# Altium PCB PCB1.PcbDoc
Units mil, origin at the board's own origin, x right, y up, seen from the top; angles counter-clockwise.
Board outline 2115.03 x 1600.03 mil, 2 copper layers (Top Layer, Bottom Layer); 33 components, 44 nets, 155 pads, 53 vias.
Unrouted connection lines stored in the file: 2.
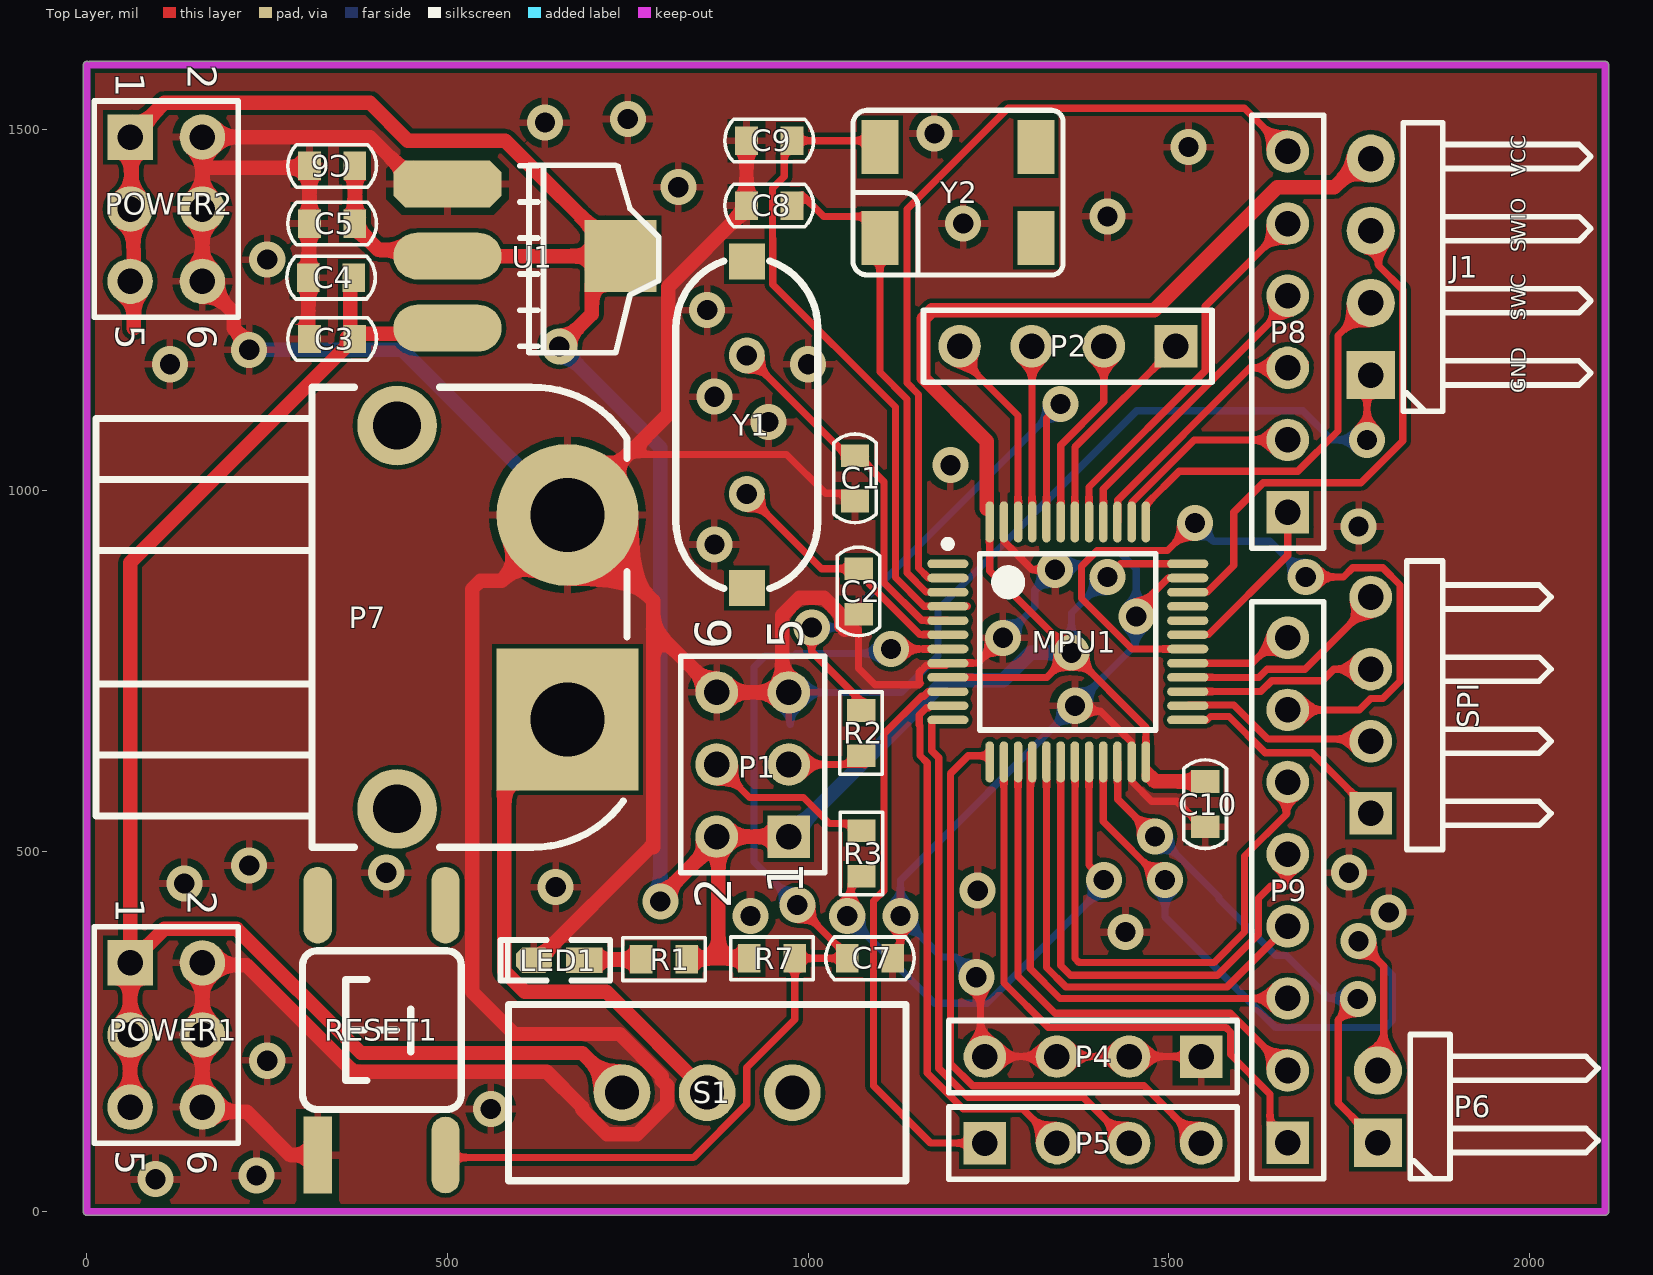
[diagram p0: Top Layer view]
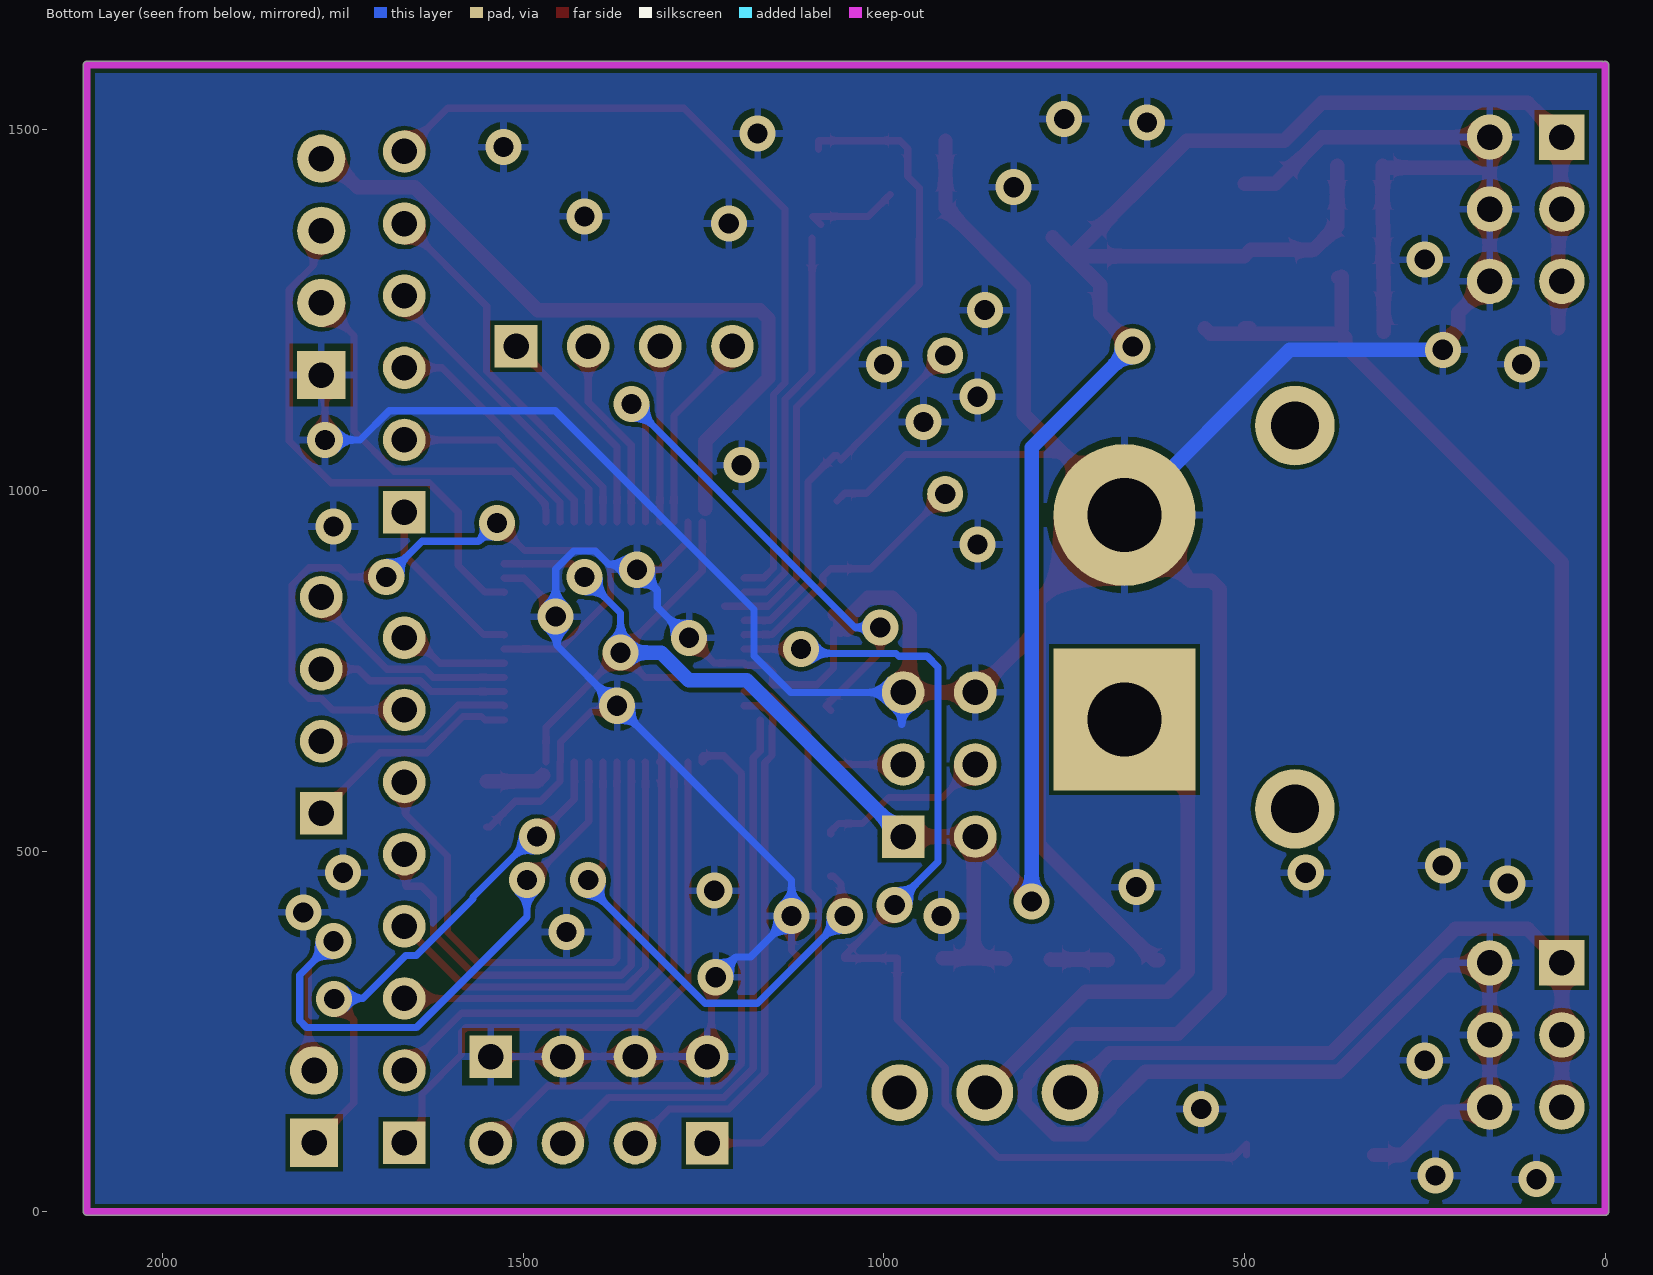
[diagram p1: Bottom Layer view, seen from below]

## Layer stack, top to bottom
Top Solder: solder mask 0.4, Solder Resist, Dk 3.5
Top Layer: signal copper 1.4
Dielectric 1: dielectric 12.6, FR-4, Dk 4.8
Bottom Layer: signal copper 1.4
Bottom Solder: solder mask 0.4, Solder Resist, Dk 3.5

## Board outline
0,-5.01 cw(c0,0) -5.01,0 -5.02,1590 cw(c0,1590) 2.5,1594.35 cw(c5,1590) 5,1595.01 2105,1595.01 cw(c2105,1590) 2110.01,1590 2110.01,0 cw(c2105,0) 2105,-5.01

## Design rules (kind name [scope] priority, off if disabled: settings)
Clearance [All] p1: gap=6 ignorepadtopadclearanceinfootprint=FALSE except(0: Arc-Hole Track-Hole SMDPad-Hole THPad-Hole Via-Hole Fill-Hole Poly-Hole Region-Hole Text-Hole)
MinimumSolderMaskSliver [All] p1: minsoldermaskwidth=0
PolygonConnect [All] p1: connectstyle=Relief reliefconductorwidth=10 reliefentries=4 polygonreliefangle="90 Angle" airgapwidth=10
RoutingVias [All] p1: holewidth=28 width=50 viastyle="Through Hole" minholewidth=28 minwidth=50 maxholewidth=28 maxwidth=50
SolderMaskExpansion [All] p1: expansion=4
Width [All] p1: maxlimit=100 minlimit=10 preferedwidth=10
29 further rules are at their usual default settings.

## Components (designator, comment, footprint, x,y, rotation, side; value= is the part's Value field where it differs from the comment)
C1 "20pf" 0603-C 1065,1016.77 r90 top
C2 "20pf" 0603-C 1070,860 r90 top
C3 "0.1uf" 0603-C 340,1210 r0 top
C4 "10uf" 0603-C 338.5,1295 r0 top
C5 "0.1uf" 0603-C 340,1370 r180 top
C6 "10uf" 0603-C 340,1450 r180 top
C7 "0.1uf" 0603-C 1085.75,351.31 r0 top
C8 "20pf" 0603-C 946.02,1395 r0 top
C9 "20pf" 0603-C 946.02,1485 r0 top
C10 "0.1uf" 0603-C 1550.53,565 r270 top
J1 "PIN4" HDR-1X4_H 1780,1160 r90 top
LED1 "红色" "LED 0603W" 654.61,348.94 r180 top
MPU1 "STM32F103C8T6" stm32f103c8t6 1360,790 r0 top
P1 "Header 3X2" HDR2X3 973.24,520 r90 top
P2 "Header 4" HDR1X4 1510,1200 r180 top
P4 "Header 4" HDR1X4 1545,215 r180 top
P5 "Header 4" HDR1X4 1245,95 r0 top
P6 "Header 2" HDR-1X2_H 1790,95.69 r90 top
P7 "Header 2" TX60PW-F20 12.68,965.98 r270 top
P8 "Header 6" HDR1X6 1665,970 r90 top
P9 "Header 8" HDR1X8 1665,95.69 r90 top
POWER1 "Header 3X2" HDR-3X2 60,345 r270 top
POWER2 "Header 3X2" HDR-3X2 60,1490 r270 top
R1 "1K" 0603-R 800,350 r180 top
R2 "100K" 0603-R 1073.5,663.5 r270 top
R3 "100K" 0603-R 1073.94,496.5 r270 top
R7 "10K" 0603-R 950,351.31 r180 top
RESET1 "KEY_M" "TSW SMD-6*6*11" 409,251.77 r90 top
S1 "SS-12F23" SS-12D10 860,165 r0 top
SPI "Header 4H" HDR1X4H 1780,552.21 r90 top
U1 "AMS1117-3.3" AMS1117 500.06,1425.03 r270 top
Y1 "8MHz" XTAL 920,1085 r180 top
Y2 "32.768K" SMD8038-4 1207.76,1412.99 r0 top

## Footprints (in the part's own frame and the unit in brackets; to place one, negate y for a bottom-side part, rotate by r counter-clockwise, add the part's x,y. Pads: shape width x height; smd on the part's side, far side on the other; paste and mask are expansions set on the pad)
0603-C [mm]
  rect 0.8x1 smd: 1(-0.8,0) 2(0.8,0)
  silkscreen extent -1.56,-0.75 1.56,0.75
0603-R [mm]
  rect 0.8x1 smd: 1(-0.8,0) 2(0.8,0)
  silkscreen extent -1.45,-0.75 1.45,0.75
AMS1117 [mil]
  oct 65x150 smd: 1(0.03,-0.06)
  oval 65x150 smd: 2(100.03,-0.06) 3(200.03,-0.06)
  rect 100x100 smd: 4(100.03,239.94)
  silkscreen extent -26,100 234,293
HDR1X4 [mm] "Connector; Header; 4 Position"
  rect 1.5x1.5 hole 0.9: 1(0,0)
  round 1.5 hole 0.9: 2(2.54,0) 3(5.08,0) 4(7.62,0)
  silkscreen extent -1.27,-1.27 8.89,1.27
HDR1X4H [mm] "Connector; Header; 4 Position; Right Angle"
  rect 1.5x1.5 hole 0.9: 1(0,0)
  round 1.5 hole 0.9: 2(2.54,0) 3(5.08,0) 4(7.62,0)
  silkscreen extent -1.27,-6.35 8.89,-1.27
HDR1X6 [mm] "Connector; Header; 6 Position"
  rect 1.5x1.5 hole 0.9: 1(0,0)
  round 1.5 hole 0.9: 2(2.54,0) 3(5.08,0) 4(7.62,0) 5(10.16,0) 6(12.7,0)
  silkscreen extent -1.27,-1.27 13.97,1.27
HDR1X8 [mm] "Connector; Header; 8 Position"
  rect 1.5x1.5 hole 0.9: 1(0,0)
  round 1.5 hole 0.9: 2(2.54,0) 3(5.08,0) 4(7.62,0) 5(10.16,0) 6(12.7,0) 7(15.24,0) 8(17.78,0)
  silkscreen extent -1.27,-1.27 19.05,1.27
HDR2X3 [mm] "Connector; Header; 3x2 Position"
  rect 1.5x1.5 hole 0.9: 1(0,0)
  round 1.5 hole 0.9: 2(0,2.54) 3(2.54,0) 4(2.54,2.54) 5(5.08,0) 6(5.08,2.54)
  silkscreen extent -1.27,-1.27 6.35,3.81
HDR-1X2_H [mm] "弯脚排针，2脚"
  rect 1.7x1.7 hole 0.9: 1(0,0)
  round 1.7 hole 0.9: 2(2.54,0)
  silkscreen extent -1.27,-7.76 3.81,-1.14, body extent -1.27,-7.77 3.81,1.27, height 4.85
HDR-1X4_H [mm] "弯脚排针，4脚"
  rect 1.7x1.7 hole 0.9: 1(0,0)
  round 1.7 hole 0.9: 2(2.54,0) 3(5.08,0) 4(7.62,0)
  silkscreen extent -1.27,-7.76 8.89,-1.14, body extent -1.27,-7.77 8.89,1.27, height 4.85
HDR-3X2 [mm] "双排排针，3x2脚"
  rect 1.6x1.6 hole 0.9: 1(0,0)
  round 1.6 hole 0.9: 2(0,2.54) 3(2.54,0) 4(2.54,2.54) 5(5.08,0) 6(5.08,2.54)
  silkscreen extent -1.27,-1.27 6.35,3.81, body extent -1.27,-1.27 6.35,3.81, height 8.5
"LED 0603W" [mil] "白色0603LED"
  rect 50x35 smd: 1(-35,0.26)
  oct 50x35 smd: 2(35,0.26)
  silkscreen extent -71,-28 81,28, body extent -31,-16 32,16, height 24
SMD8038-4 [mm]
  rect 1.3x1.9 smd: 1(-2.75,-1.6) 2(-2.75,1.6) 3(2.75,1.6) 4(2.75,-1.6)
  silkscreen extent -3.7,-2.9 3.7,2.9
SS-12D10 [mm] "脚距3mm"
  round 2 hole 1.2: 1(-3,0) 2(0,0) 3(3,0)
  silkscreen extent -7,-3.1 7,3.1, body extent -7,-3.1 7,3.1, height 9.65
stm32f103c8t6 [mm] "TSQFP, 48-Leads, Body 7.00x7.00mm, Pitch 0.50mm, IPC Medium Density"
  oval 1.45x0.3 smd: 1(-4.225,2.75) 2(-4.225,2.25) 3(-4.225,1.75) 4(-4.225,1.25) 5(-4.225,0.75) 6(-4.225,0.25) 7(-4.225,-0.25) 8(-4.225,-0.75) 9(-4.225,-1.25) 10(-4.225,-1.75) 11(-4.225,-2.25) 12(-4.225,-2.75) 25(4.225,-2.75) 26(4.225,-2.25) 27(4.225,-1.75) 28(4.225,-1.25) 29(4.225,-0.75) 30(4.225,-0.25) 31(4.225,0.25) 32(4.225,0.75) 33(4.225,1.25) 34(4.225,1.75) 35(4.225,2.25) 36(4.225,2.75)
  oval 0.3x1.45 smd: 13(-2.75,-4.225) 14(-2.25,-4.225) 15(-1.75,-4.225) 16(-1.25,-4.225) 17(-0.75,-4.225) 18(-0.25,-4.225) 19(0.25,-4.225) 20(0.75,-4.225) 21(1.25,-4.225) 22(1.75,-4.225) 23(2.25,-4.225) 24(2.75,-4.225) 37(2.75,4.225) 38(2.25,4.225) 39(1.75,4.225) 40(1.25,4.225) 41(0.75,4.225) 42(0.25,4.225) 43(-0.25,4.225) 44(-0.75,4.225) 45(-1.25,4.225) 46(-1.75,4.225) 47(-2.25,4.225) 48(-2.75,4.225)
  silkscreen extent -4.35,-3.1 3.1,3.57, body extent -3.5,-3.5 3.5,3.5, height 1.6
"TSW SMD-6*6*11" [mm] "6*6*11mm"
  rect 2.7x1 smd: 1(-4.4,2.261)
  oval 2.7x1 smd: 2(-4.4,-2.239) 3(4.4,-2.239) 4(4.4,2.261)
  silkscreen extent -2.79,-2.79 2.79,2.79, body extent -4.5,-3 4.5,3, height 10.95
TX60PW-F20 [mm] "长：18.8mm， 宽：16mm，高：8.6mm"
  round 2.8 hole 1.7: 0(-3.15,10.6) 0(10.35,10.6)
  rect 5x5 hole 2.6: 1(7.2,16.6)
  round 5 hole 2.6: 2(0,16.6)
  silkscreen extent -4.5,0 11.7,18.7, body extent -4.4,0 11.6,18.62, height 8.65
XTAL [mil]
  round 50 hole 28: 1(5,-102.13) 2(5,90)
  rect 50x50 smd: ""(5,220.31) ""(5,-232.44)
  silkscreen extent -93,-233 103,221

## Part data
C1 C2 C3 C4 C5 C6 C7 C8 C9 C10: library part Cap
LED1: library part LED-SMD, "贴片LED", BOM名称=贴片, 学习资源=https://lmdzstyle.taobao.c, 版权归属=黎明电
P1 POWER1 POWER2: "Header, 3-Pin, Dual row", LatestRevisionDate=17-Jul-2002, LatestRevisionNote="Re-released for DXP Platform.", Publisher="Altium Limited"
P2 P4 P5: "Header, 4-Pin", LatestRevisionDate=17-Jul-2002, LatestRevisionNote="Re-released for DXP Platform.", Publisher="Altium Limited"
P6 P7: "Header, 2-Pin", LatestRevisionDate=17-Jul-2002, LatestRevisionNote="Re-released for DXP Platform.", Publisher="Altium Limited"
P8: "Header, 6-Pin", LatestRevisionDate=17-Jul-2002, LatestRevisionNote="Re-released for DXP Platform.", Publisher="Altium Limited"
P9: "Header, 8-Pin", LatestRevisionDate=17-Jul-2002, LatestRevisionNote="Re-released for DXP Platform.", Publisher="Altium Limited"
R1 R2 R3 R7: library part RES-SMD
S1: library part SSW-1P, "1路波动开关", BOM名称=²¨¶, 学习资源=https://lmdzstyle.taobao.c, 版权归属=黎明电
SPI: "Header, 4-Pin, Right Angle", LatestRevisionDate=17-Jul-2002, LatestRevisionNote="Re-released for DXP Platform.", Publisher="Altium Limited"
U1: library part AMS1117
Y1 Y2: library part XTAL

## Via types
v1: diameter 50, hole 28, Top Layer to Bottom Layer, 52 vias
v2: diameter 50/50 (per signal layer), hole 28, Top Layer to Bottom Layer, 1 vias

## Nets (pads, with @x,y where several pads share a name; then routed paths per layer and width w, separated by ;. In a path a pad name is that pad's centre, name@x,y a point inside that pad or via, vN(x,y) a via of type N, cw(c..) or ccw(c..) an arc to the next point about the centre after c; other vN are vias at no path point)
ADC12_IN0: MPU1.10 P5.1 | length 794.2
  Top Layer w10: MPU1.10 1193.32,720.76 1166.45,720.76 1160.34,714.64 1157.39,714.64 1105,662.24 1105,445.07 1090.5,430.57 1090.5,174.5 1170,95 P5.1
ADC12_IN1: MPU1.11 P5.2 | length 766
  Top Layer w10: MPU1.11 1170.53,701.42 1167.75,698.64 1164.02,698.64 1154.12,688.73 1154.12,674.73 1155.26,673.59 1155.26,632.54 1165.2,622.6 1165.2,192.23 1214.96,142.47 1297.53,142.47 P5.2
ADC12_IN2: MPU1.12 P5.3 | length 793.8
  Top Layer w10: MPU1.12@1171.26,681.73 1171.26,639.17 1181.2,629.22 1181.2,198.85 1221.59,158.47 1381.53,158.47 P5.3
ADC12_IN3: MPU1.13 P5.4 | length 867.9
  Top Layer w10: MPU1.13 1251.73,631.17 1250.9,632.01 1222.02,632.01 1197.2,607.19 1197.2,205.48 1228.21,174.47 1465.53,174.47 P5.4
BOOT0: MPU1.44 R2.1 | length 793.9
  Top Layer w10: v1(1005,810) 1005,776.5 1080,701.5 R2.1 ; MPU1.44 1330.47,1100.47 v1(1350,1120)
  Bottom Layer w10: v1(1005,810) 1040,810 v1(1350,1120)
BOOT1: MPU1.20 R3.2 | length 719.6
  Top Layer w10: v1(1054.25,410) 1059.25,415 1059.25,454.25 1070,465 R3.2 ; MPU1.20 1389.53,480.47 v1(1410,460)
  Bottom Layer w10: v1(1054.25,410) 1175.25,289 1248.12,289 1410,450.88 v1(1410,460)
GND: C1.1 C2.1 C3.1 C4.1 C5.2 C6.2 C7.2 C8.1 C9.1 C10.2 J1.1 LED1.2 MPU1.8 MPU1.23 MPU1.35 MPU1.47 P1.5 P1.6 P4.1 P4.2 P4.3 P4.4 P7.2 POWER1.2 POWER1.4 POWER1.6 POWER2.2 POWER2.4 POWER2.6 RESET1.1 U1.1 | length 9487.6
  Top Layer w10: P7.2@680,965.98 680,979.76 P7.2@700,999.76 ; 750.24,1050 970,1050 1023.98,996.02 1054.25,996.02 C1.1 ; 1070,807.07 1070,753.5 1092.87,730.64 1153.71,730.64 1155.49,732.42 1154.12,733.78 1154.12,747.79 1164.02,757.69 1190.88,757.69 MPU1.8 1194.01,760.82 1235.13,760.82 v1(1270,795.69) ; C2.1@1070,822.76 C2.1 ; C7.2@1127.99,340.56 C7.2 1127.99,362.06 v1(1127.99,410) ; v1(1233.2,325) 1239.1,319.1 1239.1,220.9 P4.4 P4.3 P4.2 P4.1 ; MPU1.47 1271.76,955.99 1271.76,929.13 1310.9,890 v1(1342.42,890) ; v1(1369.84,701.5) 1377.5,693.84 1405.26,693.84 1448.24,650.87 1448.24,624.01 MPU1.23 1448.93,623.32 1448.93,596.45 1476.25,569.14 1510.96,569.14 1546.59,533.5 C10.2 ; v1(1455,825) 1455,834.1 1499.13,878.24 1525.99,878.24 MPU1.35 ; v1(1775,1070) 1775,1155 J1.1
  Top Layer w20: 162.5,1447.5 306,1447.5 C6.2 C5.2 ; v1(225,1195) 225,1203.12 203.48,1224.63 203.48,1246.52 POWER2.6 POWER2.4 POWER2.2 392.5,1490 457.5,1425 U1.1 ; C3.1@307.01,1220 C4.1 307.76,1295.75 C5.2@307.76,1367.76 ; RESET1.1 281.46,78.54 221.5,138.5 166.5,138.5 POWER1.6 POWER1.4 POWER1.2 163.27,341.73 221.5,341.73 369.23,194 637.52,194 686.52,145 686.52,142.07 721.09,107.5 762.69,107.5 804.63,149.43 804.63,174.47 797.26,181.84 797.26,187.93 738.89,246.3 592.37,246.3 534,304.67 534,863.28 545.72,875 575.24,875 P7.2 P7.2@680,965.98 ; LED1.2 624.48,348.68 780.79,505 785,505 785,808.24 ; P7.2@673.11,959.09 785,847.2 785,808.24 ; P7.2@700,999.76 750.24,1050 806,1105.76 806,1282.54 914.53,1391.06 C8.1 C9.1 ; 1051,806.98 1046,811.98 1046,826.98 1021.98,851 988.02,851 964,826.98 964,729.24 P1.5 P1.6 785,808.24 ; 1060.31,807.07 1060.31,822.76 1065.16,827.6 C2.1@1068.21,827.6
  Bottom Layer w10: 975.08,675.47 975.08,718.16 P1.5 1129.12,720 1180,770.88 1180,835 1455.53,1110.53 1685.93,1110.53 1726.46,1070 v1(1775,1070) ; v1(1233.2,325) 1204.92,353.28 1184.71,353.28 v1(1127.99,410) 1127.99,459.65 v1(1369.84,701.5) 1453.35,785 1453.35,823.35 v1(1455,825) 1455,890.91 1429.91,916 1400.09,916 1381.74,897.65 1350.07,897.65 v1(1342.42,890) 1314.13,861.72 1314.13,838.4 v1@1271.42,795.69
  Bottom Layer w20: v1(225,1195) 437.2,1195 P7.2
  other v1: 95,45 235,50 560,142.47 250,209.2 1440,387.63 920,410 1805,415 1235.13,445.07 650,450 135,455 415,470 1750,470 225,480 870,925 1763.3,950 1197.2,1035 945,1095 870,1130 115,1175 1000,1175 860,1250 250,1320 1215,1370 820,1420.51 1527.45,1475.98 1175,1495 635,1510 750,1515
  other v2: 1415,1380
NetLED1_1: LED1.1 R1.2 | length 79.4
  Top Layer w20: LED1.1 690.26,349.34 767.84,349.34 R1.2
NetP1_3: P1.3 R2.2 | length 105.5
  Top Layer w10: P1.3 1077.82,620 R2.2@1078.5,619.31
NetP1_4: P1.4 R3.1 | length 242.5
  Top Layer w10: P1.4 918.84,574.41 993.45,574.41 1029.66,538.2 1062.76,538.2 1073.5,527.45 R3.1@1073.5,523.51
NetP7_1: P7.1 S1.2 | length 736.6
  Top Layer w20: P7.1 578.6,594.9 578.6,333.3 607.24,304.67 720.33,304.67 S1.2
NRST: C7.1 MPU1.7 R7.1 RESET1.2 | length 1510.1
  Top Layer w10: RESET1.2 497.17,93.44 515.61,75 841.23,75 915,148.77 915,200 981.5,266.5 R7.1 C7.1 1054.25,355.25 1013.28,396.22 1013.28,396.72 v1(985,425) ; v1(1115,780) 1115.08,780.08 1193.58,780.08 MPU1.7
  Bottom Layer w10: v1(985,425) 925,485 925,755 940,770 979.09,770 983.09,774 1109,774 v1(1115,780)
PA4: MPU1.14 P9.1 | length 835.3
  Top Layer w10: MPU1.14 1271.42,316.89 1332.78,255.53 1579.08,255.53 1585.53,249.08 1585.53,217.84 1640.47,162.9 1640.47,120.21 P9.1
PA5: MPU1.15 P9.2 | length 725.4
  Top Layer w10: MPU1.15 1291.1,326.32 1342.42,275 1585.69,275 P9.2
PA6: MPU1.16 P9.3 | length 672.6
  Top Layer w10: MPU1.16@1308.01,635 1308.01,623.66 1308.01,336.99 1349.31,295.69 P9.3 ; MPU1.16 MPU1.16@1311.13,623.32
PA7: MPU1.17 P9.4 | length 666.1
  Top Layer w10: MPU1.17@1330.82,623.32 MPU1.17 1330.47,338.54 1357.32,311.69 1581,311.69 P9.4
PA8: MPU1.29 P9.8 | length 153.2
  Top Layer w10: MPU1.29 1615.47,760.47 1650.69,795.69 P9.8
PA9: MPU1.30 P9.7 | length 1041.9
  Top Layer w10: MPU1.30 1448.93,780.16 1379,850.09 1379,894.91 1400.88,916.8 1498.29,916.8 v1(1536.5,955) ; P9.7@1666.84,697.53 P9.7 1764,695.69 1780,711.69 1796.79,711.69 1820.53,735.43 1820.53,869 1796.79,892.74 1755.18,892.74 1742.44,880 v1(1690,880)
  Bottom Layer w10: v1(1536.5,955) 1562.02,929.47 1640.53,929.47 v1(1690,880)
PA10: MPU1.31 P8.1 | length 281.7
  Top Layer w10: MPU1.31 1526.68,800.19 1555.19,800.19 1665,910 P8.1 ; P8.1@1665,974.53 1666.37,970.46 1670,959.73 P8.1@1689.53,950
PA15: MPU1.38 P8.2 | length 279.2
  Top Layer w10: MPU1.38 1448.93,956.68 1448.93,983.55 1535.38,1070 P8.2
PB0: MPU1.18 P9.5 | length 726.2
  Top Layer w10: MPU1.18 1350.16,341.48 1363.95,327.69 1567.69,327.69 1624.47,384.47 1624.47,434.47 1641.16,451.16 1662.45,451.16 1662.45,493.14 P9.5
PB1: MPU1.19 P9.6 | length 771
  Top Layer w10: MPU1.19 1370.19,623.32 1370.19,351.14 1376.05,345.28 1562.65,345.28 1605,387.63 1605,493 1663.16,551.16 1663.16,585 1663.16,593.84 P9.6 P9.6@1665,585
PB3: MPU1.39 P8.3 | length 393.3
  Top Layer w10: MPU1.39 1429.24,956.68 1429.24,986.49 1612.76,1170 P8.3 ; P8.3@1665,1176.73 P8.3@1674.53,1176.73 ; P8.3@1674.53,1150 P8.3@1674.53,1176.73 ; P8.3@1689.53,1176.73 P8.3@1674.53,1176.73
PB4: MPU1.40 P8.4 | length 458.5
  Top Layer w10: MPU1.40 1409.21,1001.97 1665,1257.76 P8.4 ; P8.4@1674.53,1250 P8.4@1674.53,1272.52 ; P8.4@1674.53,1275.79 1686.26,1275.79 P8.4@1689.53,1272.52
PB5: MPU1.41 P8.5 | length 538.4
  Top Layer w10: MPU1.41 1389.53,1004.92 1550.53,1165.92 1550.53,1255.53 P8.5 ; P8.5@1673.29,1366.24 P8.5@1680.79,1358.74
PB6: MPU1.42 P2.1 | length 301.7
  Top Layer w10: MPU1.42 1369.84,1059.84 P2.1
PB7: MPU1.43 P2.2 | length 268.4
  Top Layer w10: MPU1.43 1350.16,1062.78 1410,1122.63 P2.2
PB8: MPU1.45 P2.3 | length 244
  Top Layer w10: P2.3 1310.44,1199.56 1310.44,956.68 MPU1.45
PB9: MPU1.46 P2.4 | length 277.3
  Top Layer w10: P2.4 1210,1185 1291.1,1103.9 MPU1.46
PB10: MPU1.21 P6.2 | length 962.7
  Top Layer w10: MPU1.21 1409.21,540.86 1490.07,460 v1(1495,460) ; v1(1763.3,375) 1798.17,340.13 1798.17,203.86 P6.2
  Bottom Layer w10: v1(1495,460) 1495,408.37 1648.21,255.16 1800.16,255.16 1810,265 1810,328.3 v1(1763.3,375)
PB11: MPU1.22 P6.1 | length 734.5
  Top Layer w10: MPU1.22 1429.24,623.32 1429.24,571.74 v1(1480.98,520) ; v1(1762.17,295) 1762.17,292.77 1735,265.6 1735,150.69 P6.1
  Bottom Layer w10: v1(1480.98,520) 1485.91,520 1569.62,436.29 1569.62,433.75 1648.21,355.16 1662.84,355.16 1722.17,295.83 1761.34,295.83 v1(1762.17,295)
PB12: MPU1.25 SPI.1 | length 317.2
  Top Layer w10: MPU1.25 1553.2,681.73 1557.99,686.52 1583.48,686.52 1633.79,636.21 1698.79,636.21 SPI.1@1785,550
PB13: MPU1.26 SPI.2 | length 281.7
  Top Layer w10: MPU1.26 1527.45,702.52 1590.1,702.52 1637.47,655.16 1777.79,655.16 SPI.2@1785,647.95
PB14: MPU1.27 SPI.3 | length 266.5
  Top Layer w10: MPU1.27 1627.68,721.1 1642.79,736.21 1712.86,736.21 1728.86,752.21 SPI.3
PB15: MPU1.28 SPI.4 | length 305.1
  Top Layer w10: MPU1.28 1624.74,740.79 1636.17,752.21 1689.01,752.21 1780,843.21 SPI.4
PC13: MPU1.2 P8.6 | length 1180.3
  Top Layer w10: MPU1.2 1193.32,878.93 1166.45,878.93 1153,892.38 1153,1133.19 1137,1149.19 1137,1390 1277,1530 1605,1530 P8.6 ; P8.6@1675.75,1472.26 P8.6@1681.77,1466.24 ; P8.6@1677.01,1473.52 P8.6@1684.29,1466.24
PC14: C8.2 MPU1.3 Y2.1 | length 683.6
  Top Layer w10: C8.2@991.18,1410.31 1021.5,1380 1098.46,1380 Y2.1@1087.01,1368.54 ; Y2.1 1099.49,1164.08 1137,1126.56 1137,885.76 1163.51,859.24 1193.32,859.24 MPU1.3
PC15: C9.2 MPU1.4 Y2.2 | length 928.8
  Top Layer w10: Y2.2@1090.47,1473.19 1090.47,1485 C9.2 966.77,1474.25 966.77,1435.24 950.77,1419.24 950.77,1349.23 951,1349 951,1285.56 1121,1115.56 1121,879.13 1160.57,839.56 1193.32,839.56 MPU1.4 1194.01,839.56 MPU1.4@1220.87,839.56
SOC_IN: C1.2 MPU1.5 Y1.1 | length 525.6
  Top Layer w10: Y1.1@904.18,1187.13 911.85,1192.04 910.97,1191.16 Y1.1 C1.2@1059.43,1042.7 ; C1.2 1068.94,1048.27 1105,1012.2 1105,872.5 1157.63,819.87 1193.32,819.87 MPU1.5
SOC_OUT: C2.2 MPU1.6 Y1.2 | length 365.7
  Top Layer w10: Y1.2 1018.5,891.5 C2.2 1073.94,891.5 1084.69,880.75 1084.69,870.19 1154.68,800.19 1193.32,800.19 MPU1.6
SWCLK: J1.2 MPU1.37 | length 529
  Top Layer w10: MPU1.37 1468.27,973.14 1469.1,973.98 1469.1,981.09 1514.54,1026.53 1678.84,1026.53 1734.68,1082.36 1734.68,1214.68 J1.2
SWIO: J1.3 MPU1.34 | length 738.1
  Top Layer w10: MPU1.34 1526.68,859.24 1553.55,859.24 1590.23,895.92 1590.23,969.84 1630.92,1010.53 1766.44,1010.53 1824.46,1068.55 1824.46,1278.42 1790.89,1311.99 1790.89,1349.11 J1.3
VCC: C3.2 C4.2 POWER1.1 POWER1.3 POWER1.5 S1.1 U1.3 | length 2279.5
  Top Layer w20: POWER1.5 POWER1.3 POWER1.1 POWER1.1@60,350 ; C3.2@365,1225 365,1296.06 C4.2 ; U1.3@492.5,1225 U1.3 U1.3@492.5,1217.5 ; U1.3@555,1225 547.5,1217.5 U1.3@492.5,1217.5 ; S1.1 686.89,220 380,220 207.5,392.5 107.5,392.5 65,350 POWER1.1@60,350 ; POWER1.1@60,350 60,900 360,1200 360,1211.75 365.75,1217.5 U1.3@492.5,1217.5
VCC3V3: C5.1 C6.1 C10.1 J1.4 MPU1.9 MPU1.24 MPU1.36 MPU1.48 P1.1 P1.2 POWER2.1 POWER2.3 POWER2.5 R1.1 R7.2 U1.2 U1.4 | length 5470.1
  Top Layer w10: MPU1.9 1330.79,740.79 v1(1365,775) ; MPU1.48 1251.73,888.27 v1(1365,775) ; v1(1415,880) 1433.27,898.27 MPU1.36 ; MPU1.24 1468.27,671.73 v1(1365,775)
  Top Layer w20: 65,1225 65,1325 63.03,1390.09 POWER2.1 107.5,1537.5 392.5,1537.5 445,1485 580,1485 U1.4 ; C6.1 C5.1 371.5,1366.06 403.95,1333.61 491.39,1333.61 U1.2 576.98,1325 U1.4 ; v1(655,1199.56) 700,1244.56 700,1285 U1.4 ; U1.4@766.11,1351.11 U1.4 ; v1(795,430) 795,435.88 873.24,514.12 P1.2 ; R1.1 832.81,351.31 875.62,351.31 ; R7.2 875.62,351.31 ; P1.1 P1.2 ; MPU1.48@1247.64,974.88 1247.64,1068.25 1160,1155.89 1160,1238.28 1171.72,1250 1480,1250 1650.51,1420.51 1729.74,1420.51 1769.23,1460 J1.4 ; MPU1.24@1472.36,605.12 1480.98,596.5 C10.1 ; P1.2 875.62,517.62 875.62,351.31
  Bottom Layer w10: v1(1365,775) 1365,830 v1(1415,880)
  Bottom Layer w20: v1(655,1199.56) 795,1059.56 v1(795,430) ; P1.1 1190,736.76 1270.47,736.76 1308.71,775 v1(1365,775)
pads on no net: MPU1.1 MPU1.32 MPU1.33 P7.0 RESET1.3 RESET1.4 S1.3 Y1. Y2.3 Y2.4

## Polygon pours and split planes (outlines as drawn)
GND on Bottom Layer "Bottom Layer-GND" (solid, remove dead copper, pour order 33): 5,1590 5,5 0,0 2105,0 2105,1580 2095,1590
GND on Top Layer "Top Layer-GND" (solid, remove dead copper, pour order 29): 0,0 0,1590 2105,1590 2105,0

## Keep-outs
Keep-Out Layer:
  lines w10: 0,1590 0,0 2105,0 2105,1590 5,1590

## Silkscreen, mask and mechanical layers (free items; w line width, h text height)
Top Overlay:
  text "VCC" at 1995,1435 h20 r90
  text "SWIO" at 1995,1330 h20 r90
  text "SWC" at 1995,1235 h20 r90
  text "GND" at 1995,1135 h20 r90
Mechanical 1:
  lines w10: 0,1590 0,0 2105,0 2105,1590 5,1590

## Dimensions
0,0 to 2105,0 on Mechanical 1
0,0 to 0,1590 on Mechanical 1

## Text inside footprints (layer, text, board x,y; h text height)
P1: Top Overlay "1" at 993.24,440 h50 r90; Top Overlay "2" at 893.24,420 h50 r90; Top Overlay "5" at 993.24,780 h50 r90; Top Overlay "6" at 893.24,780 h50 r90
POWER1: Top Overlay "1" at 40,435 h40 r270; Top Overlay "2" at 140,445 h40 r270; Top Overlay "5" at 40,85 h40 r270; Top Overlay "6" at 140,85 h40 r270
POWER2: Top Overlay "1" at 40,1580 h40 r270; Top Overlay "2" at 140,1590 h40 r270; Top Overlay "5" at 40,1230 h40 r270; Top Overlay "6" at 140,1230 h40 r270